# Altium PCB D to A.PcbDoc
Units mm, origin at the board's own origin, x right, y up, seen from the top; angles counter-clockwise.
Board outline 96.14 x 90.42 mm, 2 copper layers (Top Layer, Bottom Layer); 54 components, 34 nets, 210 pads, 17 vias.
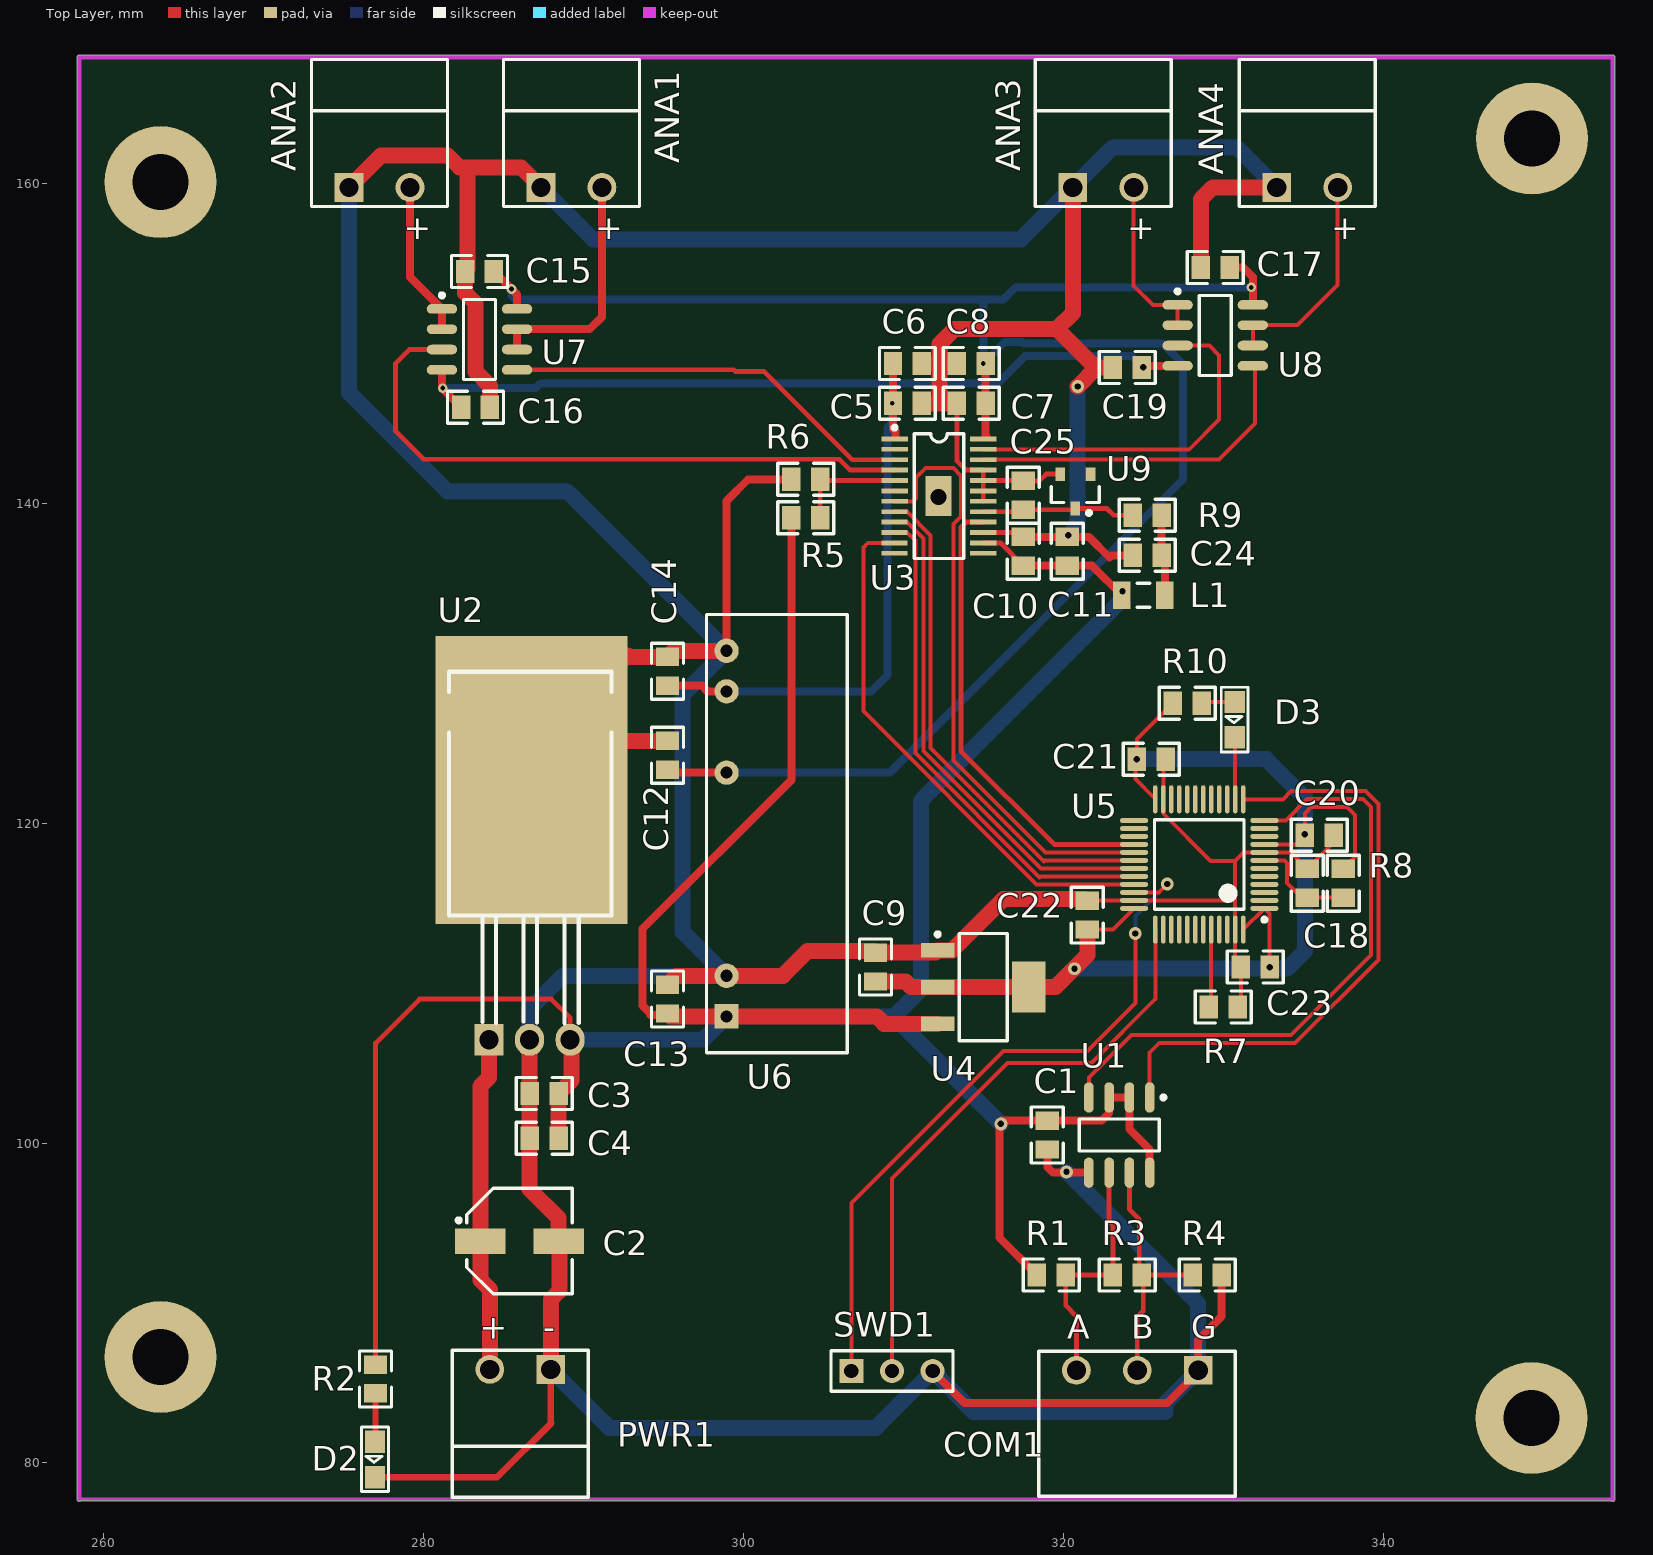
[diagram p0: Top Layer view]
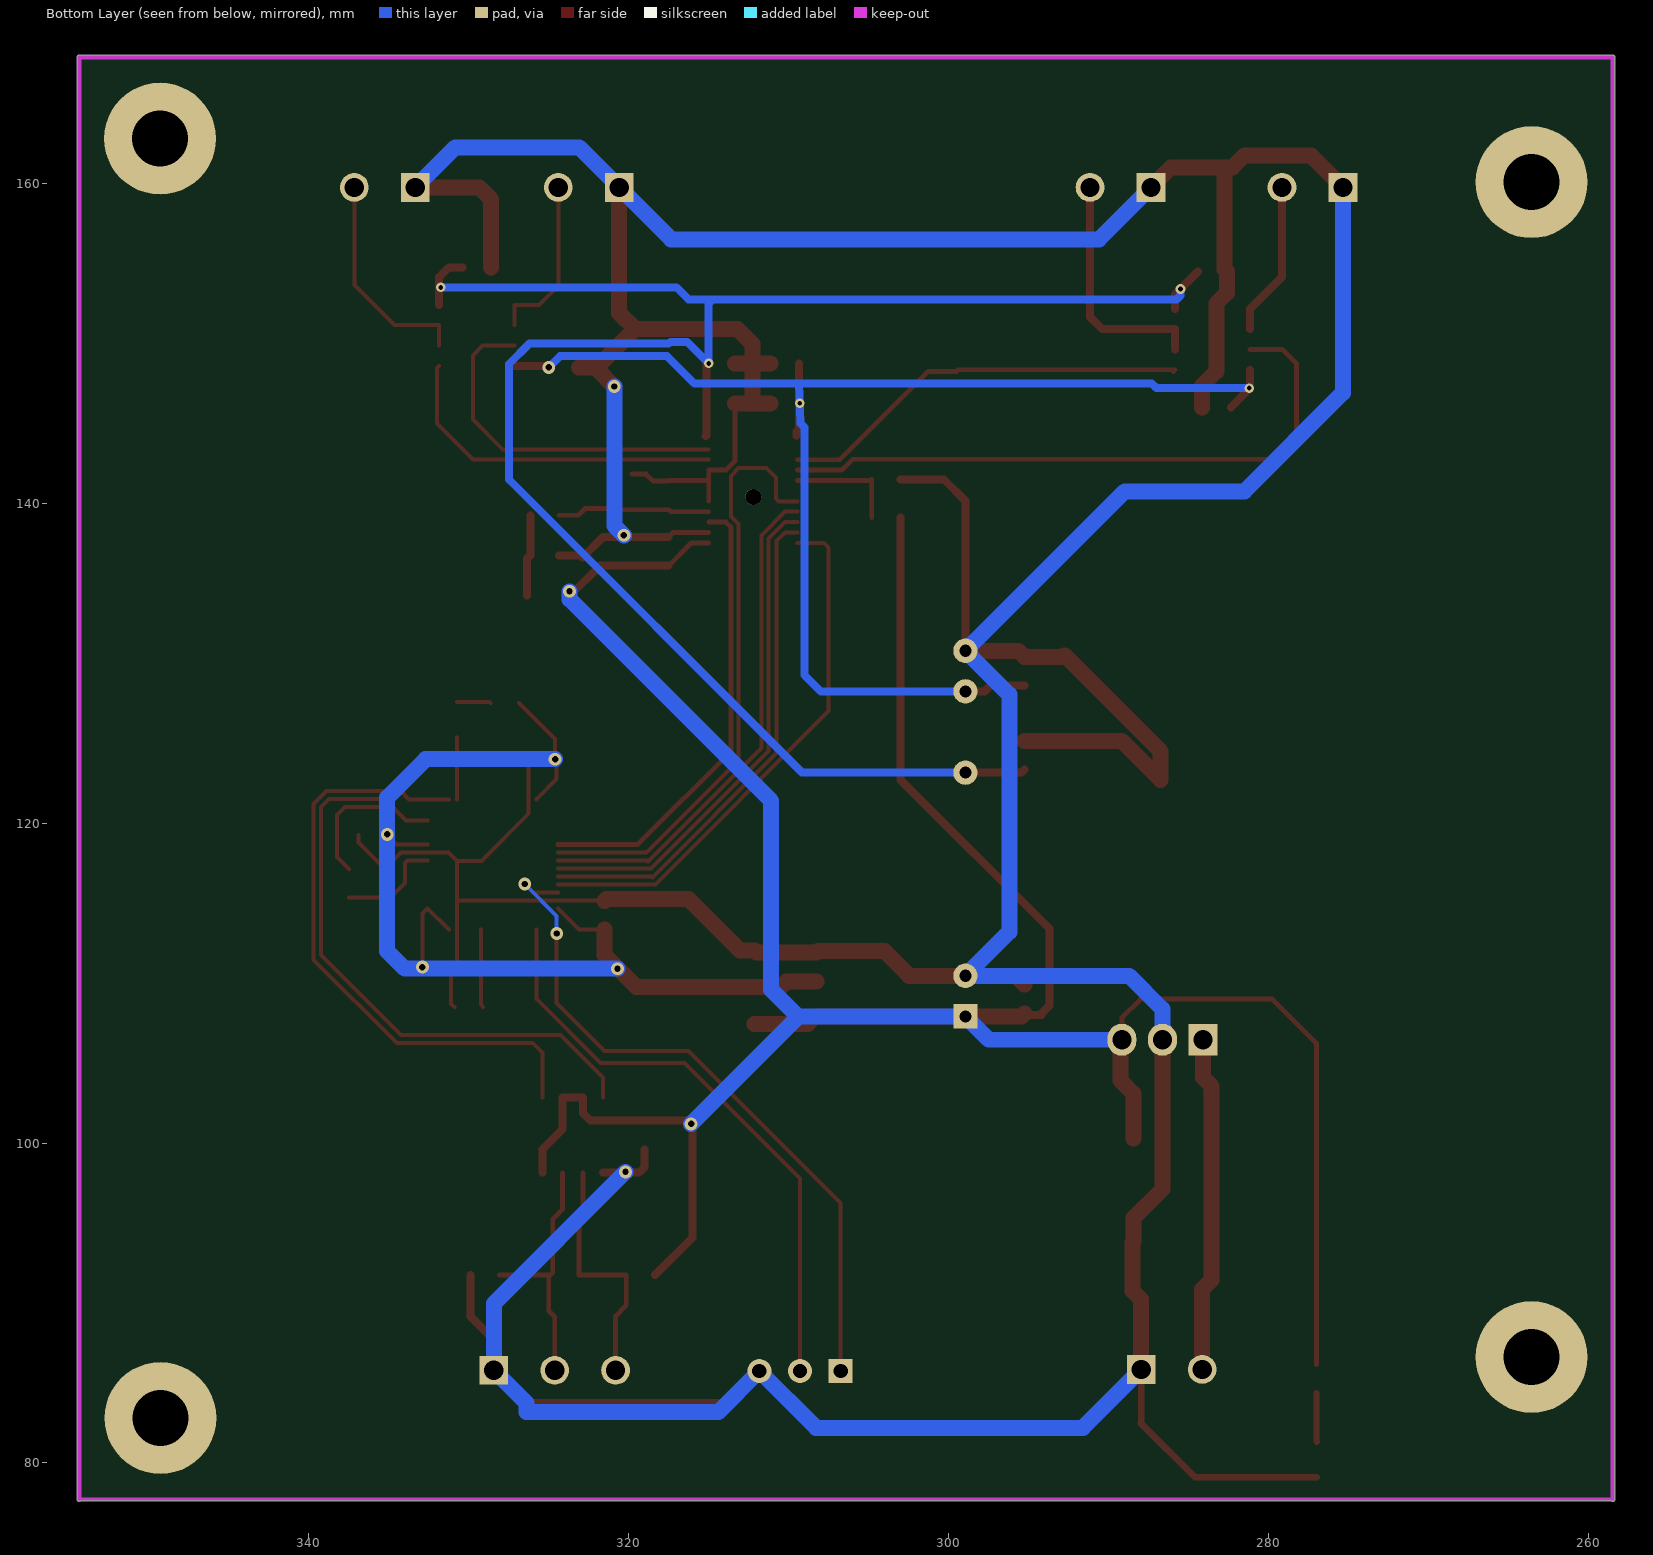
[diagram p1: Bottom Layer view, seen from below]
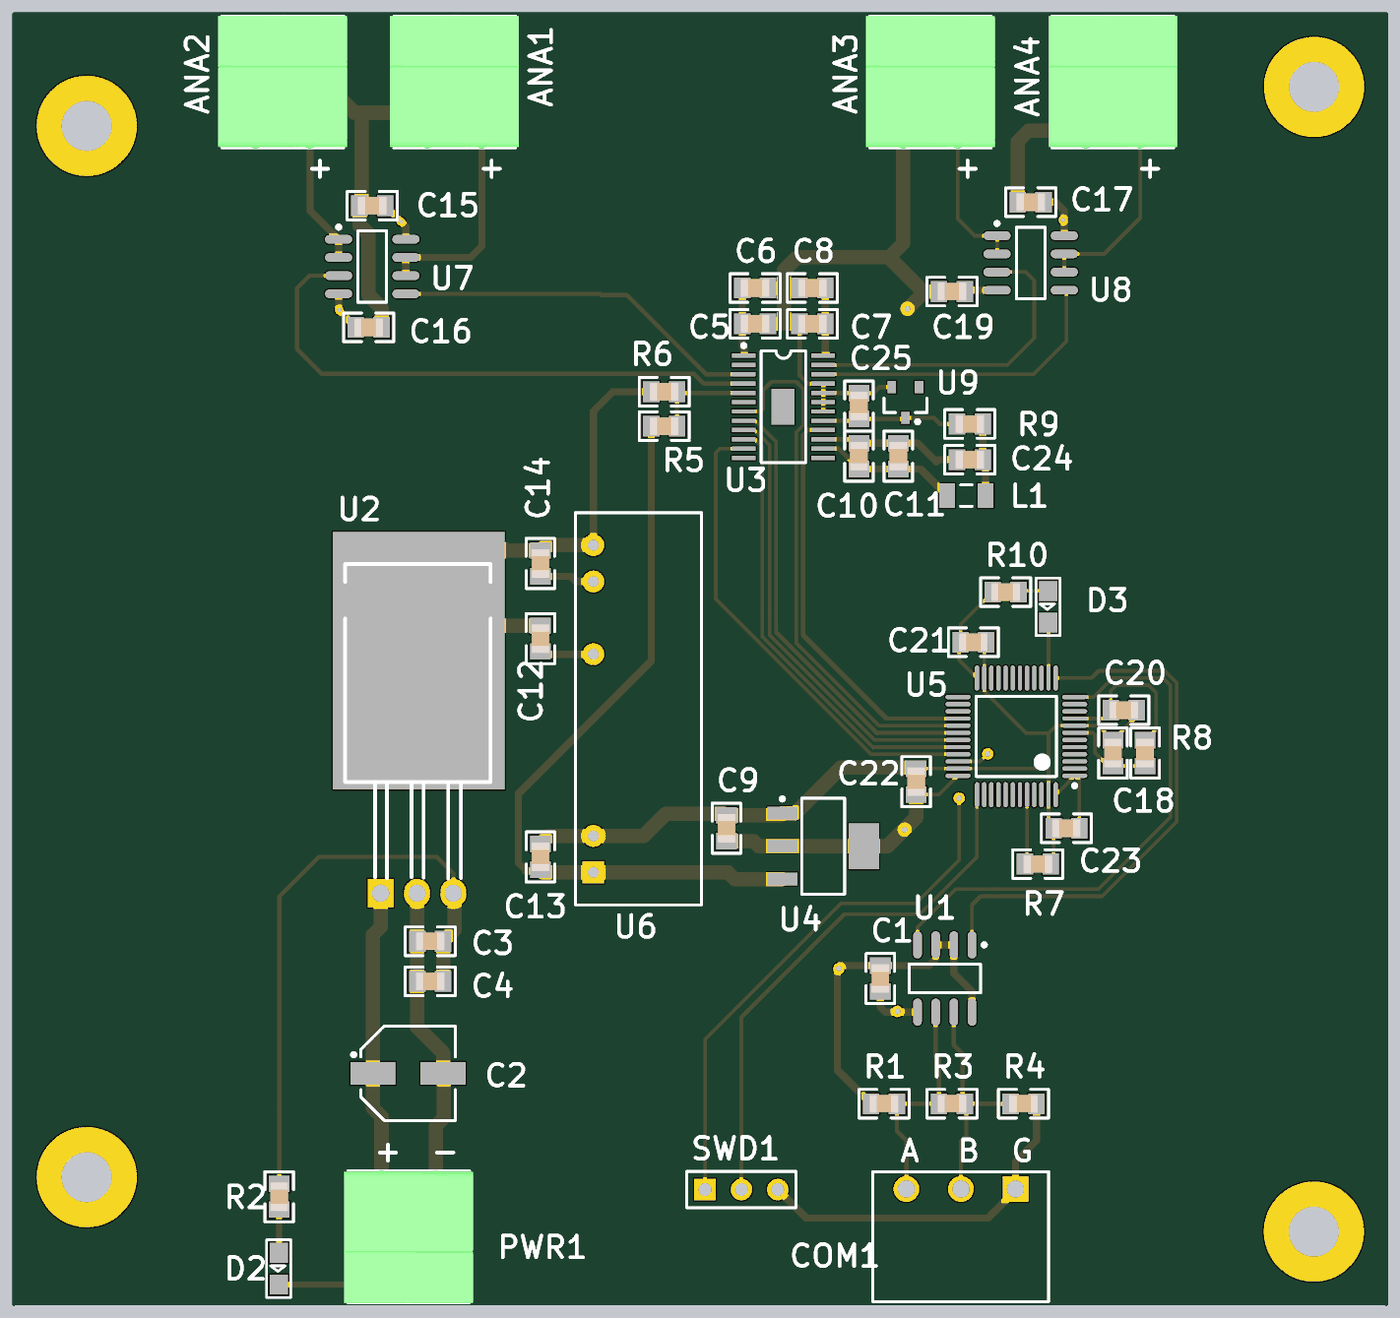
[diagram p2: 3D render of the assembled board from above, using the file's embedded part models]

## Layer stack, top to bottom
Top Layer: signal copper 0.0356
Dielectric: dielectric 0.32, FR-4, Dk 4.8
Bottom Layer: signal copper 0.0356

## Board outline
258.346,77.728 258.346,167.887 cw(c258.473,167.887) 258.382,167.977 258.385,167.979 cw(c258.476,167.89) 258.476,168.018 354.35,168.018 cw(c354.35,167.89) 354.44,167.98 354.443,167.978 ccw(c354.353,167.887) 354.441,167.979 ccw(c354.35,167.89) 354.44,167.98 354.443,167.978 cw(c354.353,167.887) 354.48,167.887 354.48,117.529 cw(c354.355,117.503) 354.483,117.503 354.483,77.728 cw(c354.355,77.728) 354.277,77.627 258.552,77.627 cw(c258.473,77.728)

## Design rules (kind name [scope] priority, off if disabled: settings)
Clearance [All] p1: gap=0.2
HoleSize [All] p1: absolutevalues=TRUE maxlimit=4 minlimit=0.025 maxpercent=80.000 minpercent=20.000
MinimumSolderMaskSliver [All] p1: minsoldermaskwidth=0.1
PolygonConnect [All] p1: connectstyle=Relief reliefconductorwidth=0.254 reliefentries=4 polygonreliefangle="90 Angle"
RoutingVias [All] p1: holewidth=0.711 width=1.27 viastyle="Through Hole" minholewidth=0.711 minwidth=1.27 maxholewidth=0.711 maxwidth=1.27
SilkToSilkClearance [All] p1: silktosilkclearance=0.1
SilkscreenOverComponentPads [All] p1: minsilkscreentomaskgap=0.1
SolderMaskExpansion [All] p1: expansion=0.102
Width [All] p1: maxlimit=1 minlimit=0.25 preferedwidth=0.4
24 further rules are at their usual default settings.

## Components (designator, comment, footprint, x,y, rotation, side; value= is the part's Value field where it differs from the comment)
ANA1 "HDR1*2_3.81" "2P HEADER 3.81 90" 289,163.5 r180 top
ANA2 "HDR1*2_3.81" "2P HEADER 3.81 90" 277,163.5 r180 top
ANA3 "HDR1*2_3.81" "2P HEADER 3.81 90" 322.25,163.5 r180 top
ANA4 "HDR1*2_3.81" "2P HEADER 3.81 90" 335,163.5 r180 top
C1 "0.1uf" EIA-0805 318.75,100.5 r270 top
C2 "10uF/35V" "BC-CAP 6.6 X5.4" 286,94 r90 top
C3 "1uf" EIA-0805 287.55,103.35 r180 top
C4 "0.1uf" EIA-0805 287.55,100.05 r0 top
C5 "1uf" EIA-0805 310.25,146 r0 top
C6 "1uf" EIA-0805 310.25,148.5 r0 top
C7 "1uf" EIA-0805 314.25,146.5 r180 top
C8 "1uf" EIA-0805 314.25,149 r180 top
C9 "Cap" EIA-0805 308.5,111 r90 top
C10 "1uf" EIA-0805 317.75,137 r90 top
C11 "1uf" EIA-0805 320.5,137 r90 top
C12 "1uF" EIA-0805 295.5,124.25 r90 top
C13 "1uF" EIA-0805 295.5,109 r90 top
C14 "1uF" EIA-0805 295,129.5 r270 top
C15 "1uf" EIA-0805 283.5,154.25 r0 top
C16 "1uf" EIA-0805 283.25,145.75 r0 top
C17 "1uf" EIA-0805 329.5,154.5 r0 top
C18 "0.1uf" EIA-0805 335.5,116.25 r90 top
C19 "1uf" EIA-0805 324,148.75 r180 top
C20 "0.1uf" EIA-0805 336,119 r0 top
C21 "0.1uf" EIA-0805 325.5,123.75 r0 top
C22 "0.1uf" EIA-0805 321.75,114.25 r90 top
C23 "0.1uf" EIA-0805 332,111.25 r180 top
C24 "0.1uF" EIA-0805 325.25,137 r180 top
C25 "1uf" EIA-0805 317.75,140.5 r90 top
COM1 "HDR1*3_3.81" "3P HEADER 3.81 90" 324.5,81.6 r0 top
D2 "LED" 0805_L 277,80.25 r90 top
D3 "BC_LED" 0805_L 330.75,126.5 r90 top
L1 "10uH" C1206 325,134.25 r0 top
PWR1 "HDR1*2_3.81" "2P HEADER 3.81 90" 286.3,82.1 r0 top
R1 "560" EIA-0805 319.25,91.5 r0 top
R2 "2K" EIA-0805 277.25,85.25 r90 top
R3 "120" EIA-0805 324,91.5 r0 top
R4 "560" EIA-0805 329,91.5 r0 top
R5 "2k" EIA-0805 303.9,138.85 r0 top
R6 "2k" EIA-0805 303.9,141.25 r0 top
R7 "10k" EIA-0805 330,108.75 r180 top
R8 "10k" EIA-0805 337.25,116.25 r270 top
R9 "2k" EIA-0805 325.25,139.5 r180 top
R10 "1K" EIA-0805 327.75,127.75 r180 top
SWD1 "Header 3" HDR1X3 306.75,85.75 r0 top
U1 "MAX13487CSA" SO8_L 323.5,100.5 r270 top
U2 "7805" TO220 286.85,121.15 r90 top
U3 "AD5754" TSSOP_24 312.2,140.45 r90 top
U4 "LM1117" SOT223_L 315,109.75 r0 top
U5 "STM32F103C8T6" PQFP-48-7*7 328.5,117.5 r180 top
U6 "DC/DC" "dc-dc 10pin sip" 302.25,119.45 r270 top
U7 "OPA2234" SO8_L 283.5,150.25 r0 top
U8 "OPA2234" SO8_L 329.5,150.5 r0 top
U9 "LM4040AIM3-2.5" SOT23_L 320.75,140.75 r270 top

## Footprints (in the part's own frame and the unit in brackets; to place one, negate y for a bottom-side part, rotate by r counter-clockwise, add the part's x,y. Pads: shape width x height; smd on the part's side, far side on the other; paste and mask are expansions set on the pad)
"2P HEADER 3.81 90" [mm]
  rect 1.8x1.8 hole 1.2: 1(1.655,3.75)
  round 1.8 hole 1.2: 2(-2.155,3.75)
  silkscreen extent -4.5,-4.25 4,4.95, body extent -4.75,-4.28 4.26,5.02, height 7.39
"3P HEADER 3.81 90" [mm]
  rect 1.8x1.8 hole 1.2: 1(3.937,4.191)
  round 1.8 hole 1.2: 2(0.127,4.191) 3(-3.683,4.191)
  silkscreen extent -6.03,-3.68 6.25,5.39, body extent -6.1,-3.68 6.22,5.33, height 7.39
0805_L [mm]
  rect 1.4x1.27 smd: 1(1.077,0.029) 2(-1.133,0.029)
  silkscreen extent -2.04,-0.8 2,0.87, body extent -1.93,-0.71 1.88,0.77, height 2
"BC-CAP 6.6 X5.4" [mm]
  rect 1.6x3.15 smd: 1(-0.127,2.45) 2(-0.127,-2.45)
  silkscreen extent -3.43,-3.3 3.17,3.92, body extent -3.43,-3.5 3.17,3.5, height 5.4
C1206 [mm] "Chip Capacitor, Body 3.2x1.6mm, IPC High Density"
  rect 1.1x1.7 smd: 1(-1.35,0) 2(1.35,0)
  silkscreen extent -0.4,-0.75 0.4,0.75, body extent -1.7,-0.9 1.7,0.9, height 1.3
"dc-dc 10pin sip" [mil]
  rect 60x60 hole 30: 1(453.94,-130.08)
  round 60 hole 30: 2(353.94,-130.08) 7(-146.06,-130.08) 9(-346.06,-130.08) 10(-446.06,-130.08)
  silkscreen extent -535,-179 543,167, body extent -535,-177 543,165, height 433
EIA-0805 [mm]
  rect 1.15x1.45 smd: 1(-0.9,0.25) 2(0.9,0.25)
  silkscreen extent -1.75,-0.75 1.75,1.25, body extent -1,-0.37 1,0.88, height 0.6
HDR1X3 [mm] "Connector; Header; 3 Position"
  rect 1.5x1.5 hole 0.9: 1(0,0)
  round 1.5 hole 0.9: 2(2.54,0) 3(5.08,0)
  silkscreen extent -1.27,-1.27 6.35,1.27
PQFP-48-7*7 [mm]
  oval 1.75x0.3 smd: 1(-4.075,2.831) 2(-4.075,2.331) 3(-4.075,1.831) 4(-4.075,1.331) 5(-4.075,0.831) 6(-4.075,0.331) 7(-4.075,-0.169) 8(-4.075,-0.669) 9(-4.075,-1.169) 10(-4.075,-1.669) 11(-4.075,-2.169) 12(-4.075,-2.669) 25(4.075,-2.669) 26(4.075,-2.169) 27(4.075,-1.669) 28(4.075,-1.169) 29(4.075,-0.669) 30(4.075,-0.169) 31(4.075,0.331) 32(4.075,0.831) 33(4.075,1.331) 34(4.075,1.831) 35(4.075,2.331) 36(4.075,2.831)
  oval 0.3x1.75 smd: 13(-2.75,-3.994) 14(-2.25,-3.994) 15(-1.75,-3.994) 16(-1.25,-3.994) 17(-0.75,-3.994) 18(-0.25,-3.994) 19(0.25,-3.994) 20(0.75,-3.994) 21(1.25,-3.994) 22(1.75,-3.994) 23(2.25,-3.994) 24(2.75,-3.994) 37(2.75,4.156) 38(2.25,4.156) 39(1.75,4.156) 40(1.25,4.156) 41(0.75,4.156) 42(0.25,4.156) 43(-0.25,4.156) 44(-0.75,4.156) 45(-1.25,4.156) 46(-1.75,4.156) 47(-2.25,4.156) 48(-2.75,4.156)
  silkscreen extent -4.2,-2.72 2.8,3.66, body extent -3.5,-3.42 3.5,3.58, height 1.6
SO8_L [mm] "SOIC, 8-Leads, Body 4.9x3.9mm, Pitch 1.27mm, IPC High Density"
  oval 1.9x0.6 smd: 1(-2.35,1.905) 2(-2.35,0.635) 3(-2.35,-0.635) 4(-2.35,-1.905) 5(2.35,-1.905) 6(2.35,-0.635) 7(2.35,0.635) 8(2.35,1.905)
  silkscreen extent -2.47,-2.5 1,2.88, body extent -2,-2.5 2,2.5, height 1.75
SOT23_L [mm] "SOT23, 3-Leads, Body 2.9x1.3mm, Pitch 0.95mm, Lead Span 2.3mm - Reverse Pinning, IPC High Density"
  rect 0.85x0.6 smd: 1(1.075,0) 2(-1.075,-0.95) 3(-1.075,0.95)
  silkscreen extent -0.3,-1.5 1.47,1.5, body extent -0.7,-1.5 0.7,1.5, height 1.1
SOT223_L [mm] "SOT223, 4-Leads, Body 6.5x3.5mm, Pitch 2.3mm, Lead Span 7mm, IPC High Density"
  rect 2.1x0.9 smd: 1(-2.85,2.3) 2(-2.85,0) 3(-2.85,-2.3)
  rect 2.1x3.2 smd: 4(2.85,0)
  silkscreen extent -2.97,-3.35 1.5,3.42, body extent -1.85,-3.35 1.85,3.35, height 1.7
TO220 [mm]
  rect 2x1.8 hole 1.2: 1(-14.69,2.764)
  oval 2x1.8 hole 1.2: 2(-14.69,0.224) 3(-14.69,-2.316)
  rect 18x12 smd: 2(1.56,0.104)
  silkscreen extent -13.66,-4.92 8.32,5.24
TSSOP_24 [mm]
  rect 2.5x1.6 smd: 0(0,0)
  rect 0.3x1.65 smd: 1(3.575,2.75) 2(2.925,2.75) 3(2.275,2.75) 4(1.625,2.75) 5(0.975,2.75) 6(0.325,2.75) 7(-0.325,2.75) 8(-0.975,2.75) 9(-1.625,2.75) 10(-2.275,2.75) 11(-2.925,2.75) 12(-3.575,2.75) 13(-3.575,-2.8) 14(-2.925,-2.8) 15(-2.275,-2.8) 16(-1.625,-2.8) 17(-0.975,-2.8) 18(-0.325,-2.8) 19(0.325,-2.8) 20(0.975,-2.8) 21(1.625,-2.8) 22(2.275,-2.8) 23(2.925,-2.8) 24(3.575,-2.8)
  silkscreen extent -3.9,-1.58 4.4,2.87

## Part data
ANA1 ANA2 ANA3 ANA4 COM1 PWR1: library part HDR
C1 C5 C6 C7 C8 C10 C11 C15 C16 C17 C18 C19 C20 C21 C22 C23 C25: library part Cap, "Capacitor"
C2: library part "CAPACITOR POL", "Capacitor"
C9: library part "Cap Pol1", "Polarized Capacitor (Radial)"
C12 C13 C14: library part CAP
C24: library part CAP, "Capacitor"
L1: library part INDUCTOR
R1 R3 R4 R5 R6 R7 R8 R9: library part Res1, "Resistor"
R2: library part RES1
R10: library part BC_R
SWD1: "Header, 3-Pin"
U1: library part MAX485CSA, "Low-Power, Slew-Rate-Limited RS-485/RS-422 Transceiver"
U2: library part "Volt Reg", "Voltage Regulator"
U5: "STM32 ARM-based 32-bit MCU with 64 Kbytes Flash, 48-pin LQFP, Industrial Temperature"
U6: library part DC/DC-051212_0
U9: "Precision Micropower Shunt Voltage Reference"

## Free pads (board coordinates)
  round 7 hole 3.5: 0(263.553,86.618) 0(263.553,160.078) 0(349.283,82.808) 0(349.3,162.8)
  round 1 hole 1: 1(312.2,140.4)

## Via types
v1: diameter 0.8, hole 0.4, Top Layer to Bottom Layer, 12 vias
v2: diameter 0.6, hole 0.3, Top Layer to Bottom Layer, 5 vias

## Nets (pads, with @x,y where several pads share a name; then routed paths per layer and width w, separated by ;. In a path a pad name is that pad's centre, name@x,y a point inside that pad or via, vN(x,y) a via of type N, cw(c..) or ccw(c..) an arc to the next point about the centre after c; other vN are vias at no path point)
+12V_A: C7.1 C8.1 C12.1 C15.2 C17.2 U3.24 U6.7 U7.8 U8.8 | length 122.9
  Top Layer w0.5: C15.2 285.85,153.05 U7.8 ; C12.1 295.44,123.16 U6.7 ; C8.1 C7.1 315.15,144.25 315.2,144.2 ; C17.2 331.25,154.75 331.85,154.15 U8.8
  Bottom Layer w0.5: v2(285.5,153.4) 285.5,153 285.75,152.75 314.75,152.75 ; U6.7 309.16,123.16 327.5,141.5 327.5,148.7 326.2,150 317.5,150 317.4,150.1 316.35,150.1 v2(315,148.75) 315,152.5 314.75,152.75 ; v2(331.75,153.5) 317,153.5 316.25,152.75 314.75,152.75
+24VDC: C2.1 PWR1.2 U2.1 | length 21.1
  Top Layer w1: U2.1 284.086,104.086 283.55,103.55 C2.1 283.55,91.45 284.145,90.855 PWR1.2
-12V_A: C5.1 C6.1 C14.2 C16.1 C19.1 U3.1 U6.9 U7.4 U8.4 | length 87.3
  Top Layer w0.5: U7.4 281.15,147.2 C16.1 ; C14.2 297.4,128.6 297.76,128.24 U6.9 ; C6.1 C5.1 309.35,144.65 309.5,144.5 309.5,144.25 ; C19.1 324.995,148.595 U8.4
  Bottom Layer w0.5: v2(281.2,147.2) 287,147.2 287.3,147.5 309.35,147.5 ; U6.9 307.99,128.24 309,129.25 309,144.75 309.25,145 309.35,147.5 ; v1(325,148.5) 324.3,149.2 317.6,149.2 315.9,147.5 309.35,147.5
  other v2: 309.3,146.25
CLK2: SWD1.2 U5.37 | length 37.5
  Top Layer w0.25: SWD1.2 309.29,97.79 316.5,105 321.75,105 325.75,109 U5.37
CLR: U3.11 U5.33 | length 33.7
  Top Layer w0.25: U3.11 307.775,137.525 307.5,137.25 307.5,127 318.331,116.169 U5.33
D3V32: C9.1 C20.1 C21.1 C22.1 C23.1 R8.1 R10.2 U4.2 U4.4 U5.1 U5.9 U5.24 U5.36 U5.48 | length 79.7
  Top Layer w0.25: C22.1 323.1,113.35 324.419,114.669 U5.36 ; U5.24 325.75,121.5 324.5,122.75 324.5,123.9 v1(324.6,124) 324.6,125.25 R10.2 ; U5.48 U5.1 332.9,114.344 v1(332.9,111) ; U5.9 334.519,118.669 C20.1 v1(335.1,119.3) 335.1,120.6 335.5,121 337.75,121 338.25,120.5 338.25,117.9 R8.1
  Top Layer w1: C9.1 310.15,110.1 310.5,109.75 U4.2 U4.4 319.5,109.75 321.5,111.75 C22.1
  Bottom Layer w1: v1(320.7,110.9) 334,110.9 335.1,112 v1(335.1,119.3) 335.1,121.6 332.7,124 v1(324.6,124)
D5V2: C1.1 C3.1 C4.2 C10.1 C11.1 C13.1 L1.1 R1.1 R2.2 R5.1 U1.2 U1.3 U1.8 U2.3 U3.14 U4.3 U6.1 | length 194
  Top Layer w0.3: R2.2 277,106.25 279.75,109 288,109 289.166,107.834 U2.3 ; U3.14 316.075,137.525 C10.1
  Top Layer w0.5: 296.1,107.92 296.02,108 295.35,108 294.2,108 294.2,108.1 293.7,108.6 293.7,113.4 303,122.7 R5.1 ; C10.1 C11.1 321.8,136.1 L1.1 ; R1.1 316,94.1 316,101.25 316.15,101.4 C1.1 319.004,101.396 322.396,101.396 322.865,101.865 U1.3 U1.2 324.135,100.865 325.405,99.595 U1.8
  Top Layer w1: C4.2 C3.1 289.25,103.9 289.25,106.376 U2.3 ; C13.1 295.35,108 295.43,107.92 296.1,107.92 U6.1 308.33,107.92 308.8,107.45 U4.3
  Bottom Layer w1: U2.3 297.486,106.46 U6.1 298.966,107.9 309.4,107.9 ; v1(316.1,101.2) 309.4,107.9 ; v1(323.7,134.5) 323.7,134 311.1,121.4 311.1,109.6 309.4,107.9
GND2: ANA1.1 ANA2.1 ANA3.1 ANA4.1 C1.2 C2.2 C3.2 C4.1 C5.2 C6.2 C7.2 C8.2 C9.2 C10.2 C11.2 C12.2 C13.2 C14.1 C15.1 C16.2 C17.1 C18.2 C19.2 C20.2 C21.2 C22.2 C23.2 C24.2 C25.2 COM1.1 D2.2 PWR1.1 R4.2 R6.1 R7.1 SWD1.3 U1.5 U2.2 U3.15 U3.18 U3.19 U3.20 U3.21 U4.1 U5.8 U5.23 U5.35 U5.47 U6.2 U6.10 U9.2 | length 466
  Top Layer w0.25: C22.2@321.4,115.25 321.481,115.169 U5.35 330.681,115.169 330.75,115.1 ; C21.2 326.25,123.85 U5.23 326.25,120.597 329.197,117.65 330.75,117.65 ; R7.1 331.1,108.7 C23.2 330.75,111.35 U5.47 330.75,115.1 ; C20.2 336.9,118.8 C18.2 334.231,118.169 U5.8 331.331,118.169 331.3,118.2 330.75,117.65 ; 330.75,115.1 330.75,117.65
  Top Layer w0.3: C7.2 313.35,142.65 313.925,142.075 U3.21 U3.20 ; U3.15 317.225,138.175 C10.2 ; U3.18 U3.19 U3.20 ; U9.2 318.925,141.825 318.5,141.4 C25.2 317.475,141.425 U3.20
  Top Layer w0.4: D2.2 284.617,79.117 288,82.5 287.955,82.545 PWR1.1
  Top Layer w0.5: U6.10 298.946,140.146 300.3,141.5 R6.1 ; SWD1.3 313.83,83.75 326.5,83.75 328.437,85.687 COM1.1 328.437,87.687 329.9,89.15 R4.2 ; C10.2 C11.2 321.6,137.9 322.9,136.6 323.05,136.75 C24.2 ; C1.2 319,98.5 319.35,98.15 U1.5
  Top Layer w1: ANA2.1 277.345,161.75 281.5,161.75 282.25,161 282.75,161 ; C16.2 284.15,147.35 283.25,148.25 283.25,152.5 282.6,153.15 C15.1 282.75,154.65 282.75,161 ; U2.2@286.626,106.46 286.626,97.124 288.45,95.3 C2.2 288.5,93.823 288.5,90.75 287.955,90.205 PWR1.1 ; ANA1.1 286.095,161 282.75,161 ; C13.2 295.81,110.46 U6.2 302.46,110.46 304,112 308.15,112 C9.2 312,111.9 U4.1 313.05,112.05 316.25,115.25 C22.2@321.4,115.25 ; C12.2 289.186,125.15 286.746,122.71 286.746,124.496 292.75,130.5 292.85,130.4 C14.1 295.63,130.78 U6.10 ; C5.2 312.25,146.25 ; C6.2 312.25,148.75 ; C7.2 312.25,146.25 ; C8.2 312.25,148.75 ; ANA3.1 320.595,151.895 319.6,150.9 ; v1(320.9,147.3) 322,148.4 322,148.5 ; C22.2@321.481,115.169 C22.2 ; C19.2 322,148.5 ; C17.1 328.6,159 329.35,159.75 ANA4.1 ; 312.25,146.25 312.25,148.75 ; 312.25,148.75 312.25,149.95 313.2,150.9 319.6,150.9 ; 319.6,150.9 322,148.5
  Bottom Layer w1: ANA2.1 275.345,146.905 281.5,140.75 288.976,140.75 U6.10 296.2,128.034 296.2,113.206 U6.2 288.71,110.46 286.626,108.376 U2.2@286.626,106.46 ; ANA1.1 290.595,156.5 317.345,156.5 ANA3.1 323.095,162.25 330.845,162.25 ANA4.1 ; PWR1.1 291.605,82.2 308.28,82.2 SWD1.3 314.38,83.2 326.4,83.2 326.4,83.754 COM1.1 328.437,89.963 v1(320.2,98.2) ; v1(320.3,138) 320.9,138.6 v1(320.9,147.3)
LDAC: U3.10 U5.32 | length 31.7
  Top Layer w0.25: U3.10 310.235,138.175 310.75,137.66 310.75,124.386 318.517,116.619 318.567,116.669 U5.32
NetC18_1: C18.1 R8.2 U5.7 | length 6.6
  Top Layer w0.25: U5.7 333.831,117.669 334,117.5 334,116.25 334.9,115.35 C18.1 R8.2
NetC24_1: C24.1 L1.2 R9.1 | length 5.1
  Top Layer w0.5: R9.1 C24.1 326.35,136.55 L1.2
NetCOM1_2: COM1.2 R3.2 R4.1 U1.7 | length 16.1
  Top Layer w0.3: U1.7 324.135,95.865 324.75,95.25 324.75,91.9 R3.2 ; COM1.2 324.627,89.127 325,89.5 325,91.65 R3.2 ; R4.1 R3.2
NetCOM1_3: COM1.3 R1.2 R3.1 U1.6 | length 15.7
  Top Layer w0.3: COM1.3 320.817,89.183 320.15,89.85 R1.2 R3.1 323.1,94.9 322.865,95.135 U1.6
NetD2_1: D2.1 R2.1 | length 3
  Top Layer w0.4: D2.1 277,81.356 R2.1
NetD3_1: D3.1 R10.1 | length 2.1
  Top Layer w0.25: R10.1 328.727,127.577 D3.1
NetR5_2: R5.2 R6.2 U3.5 | length 7.1
  Top Layer w0.3: R5.2 R6.2 304.875,141.425 U3.5
NetR7_2: R7.2 U5.44 | length 4.9
  Top Layer w0.25: R7.2 329.25,108.65 U5.44
OUT_A: ANA1.2 U7.6 U7.7 | length 15
  Top Layer w0.5: U7.6 U7.7 290.385,150.885 291.155,151.655 ANA1.2
OUT_B: ANA2.2 U7.1 U7.2 | length 9.7
  Top Layer w0.5: ANA2.2 279.155,154.15 U7.1 U7.2
OUT_C: ANA3.2 U8.1 U8.2 | length 10.7
  Top Layer w0.25: ANA3.2 324.405,153.595 325.595,152.405 U8.1 U8.2
OUT_D: ANA4.2 U8.6 U8.7 | length 13.7
  Top Layer w0.25: U8.6 U8.7 334.635,151.135 337.155,153.655 ANA4.2
OUTA: U3.3 U7.5 | length 26.1
  Top Layer w0.3: U7.5@285.945,148.25 U7.5 299.405,148.345 299.5,148.25 301.283,148.25 306.808,142.725 U3.3
OUTB: U3.4 U7.3 | length 39.7
  Top Layer w0.3: U7.3 279.115,149.615 278.25,148.75 278.25,144.5 280,142.75 306,142.75 306.675,142.075 U3.4
OUTC: U3.23 U8.3 | length 22.4
  Top Layer w0.25: U3.23 327.875,143.375 329.75,145.25 329.75,149.25 329.135,149.865 U8.3
OUTD: U3.22 U8.5 | length 21.6
  Top Layer w0.25: U3.22 329.725,142.725 332,145 332,148.445 U8.5
REF: C25.1 R9.2 U3.17 U9.1 | length 9.6
  Top Layer w0.3: U3.17 317.375,139.475 C25.1 320.675,139.6 U9.1 322.725,139.675 323.15,139.25 R9.2
RXIN2: U1.1 U5.13 | length 38.2
  Top Layer w0.25: U1.1 325.405,105.655 326,106.25 334.5,106.25 339.7,111.45 339.7,121.186 338.886,122 334.25,122 333.744,121.494 U5.13
SCLK: U3.8 U5.30 | length 31.8
  Top Layer w0.25: U3.8 310.235,139.475 311.711,137.998 311.711,124.698 318.79,117.619 318.84,117.669 U5.30
SDIN: U3.9 U5.31 | length 31.7
  Top Layer w0.25: U3.9 310.235,138.825 311.261,137.798 311.261,124.511 318.604,117.169 U5.31
SDO: U3.16 U5.28 | length 28.8
  Top Layer w0.3: U3.16 313.925,138.825 313.6,138.5 313.6,124.5 319.431,118.669 U5.28
STATE2: D3.2 U5.14 | length 3.9
  Top Layer w0.25: D3.2 330.75,125.338 U5.14
SWD2: SWD1.1 U5.34 | length 43.9
  Top Layer w0.25: SWD1.1 306.75,96.25 316.25,105.75 321.5,105.75 324.5,108.75 v1@324.5,113 ; U5.34 325.969,115.669 v1(326.5,116.2)
  Bottom Layer w0.25: v1(324.5,113.1) 324.5,114.2 v1(326.5,116.2)
SYNC: U3.7 U5.29 | length 37.7
  Top Layer w0.25: U3.7 310.625,140.125 310.8,140.3 310.8,141.6 311.4,142.2 313.128,142.2 313.614,141.714 313.614,139.186 313.125,138.697 313.125,123.921 318.877,118.169 U5.29
TXIN2: U1.4 U5.12 | length 38.8
  Top Layer w0.25: U1.4 321.595,104.095 324.25,106.75 334.25,106.75 339.25,111.75 339.25,121 338.75,121.5 335.25,121.5 333.919,120.169 U5.12
pads on no net: U3.0 U3.2 U3.6 U3.12 U3.13 U5.2 U5.3 U5.4 U5.5 U5.6 U5.10 U5.11 U5.15 U5.16 U5.17 U5.18 U5.19 U5.20 U5.21 U5.22 U5.25 U5.26 U5.27 U5.38 U5.39 U5.40 U5.41 U5.42 U5.43 U5.45 U5.46 U9.3

## Keep-outs
Keep-Out Layer:
  lines w0.2: 258.473,77.728 291.5,77.728 354.355,77.728
  lines w0.254: 258.473,77.728 258.473,167.887 258.476,167.89 354.35,167.89 354.353,167.887 354.353,117.506 ; 354.355,77.728 354.355,117.503

## Silkscreen, mask and mechanical layers (free items; w line width, h text height)
Top Overlay:
  text "+" at 278.75,156.5 h1.5
  text "+" at 290.75,156.5 h1.5
  text "+" at 324,156.5 h1.5
  text "+" at 336.75,156.5 h1.5
  text "+" at 283.5,87.75 h1.5
  text "-" at 287.5,87.75 h1.5
  text "A" at 320.25,87.75 h1.5
  text "B" at 324.25,87.75 h1.5
  text "G" at 328,87.75 h1.5

## Text inside footprints (layer, text, board x,y; h text height)
C2: Mechanical 1 "1" at 286.45,93.709 h0.75 r90